# Altium PCB Bluetooth.PcbDoc
Units mm, origin at the board's own origin, x right, y up, seen from the top; angles counter-clockwise.
Board outline 43.18 x 24.38 mm, 2 copper layers (Top Layer, Bottom Layer); 14 components, 14 nets, 52 pads, 8 vias.
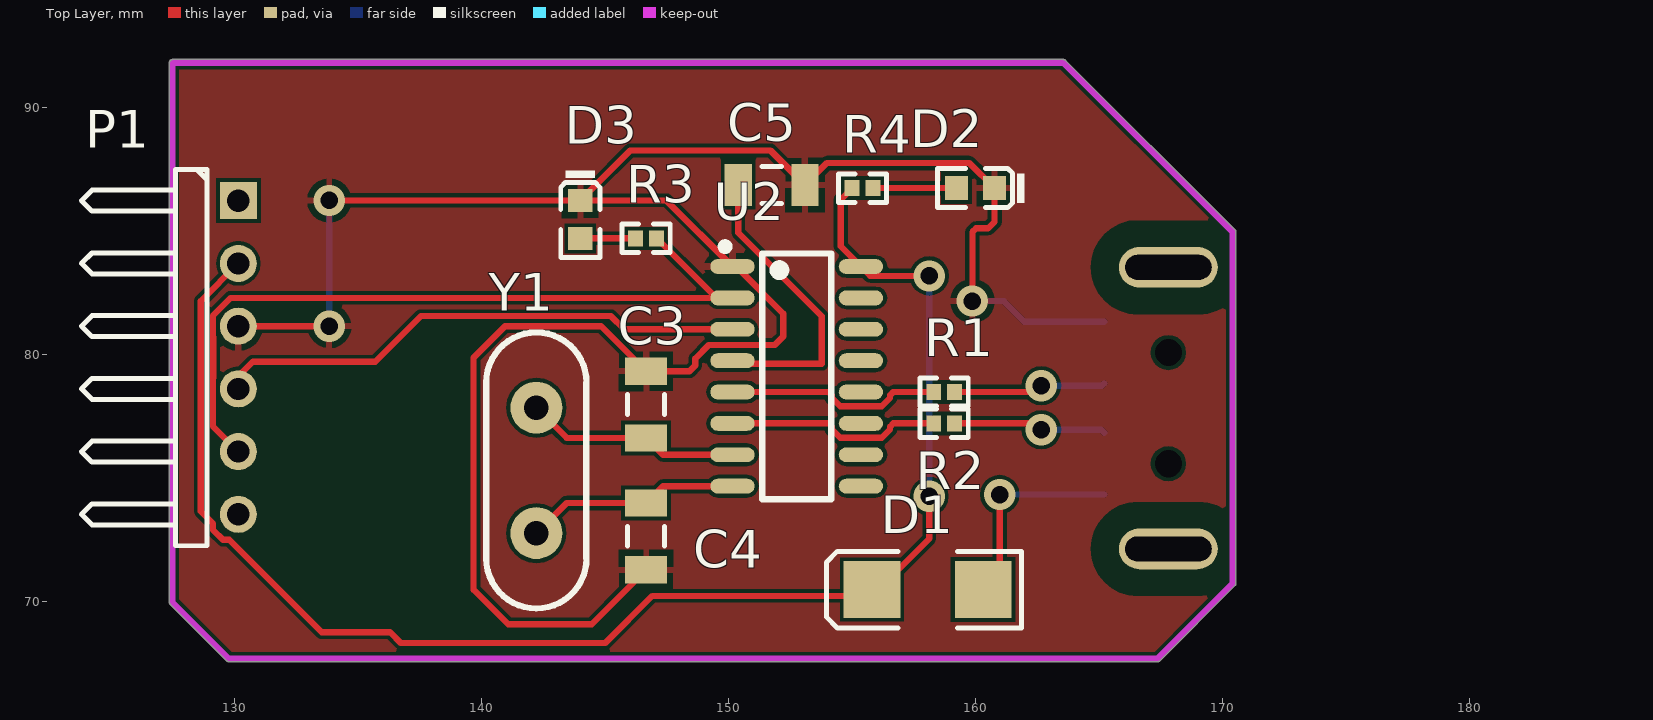
[diagram p0: Top Layer view]
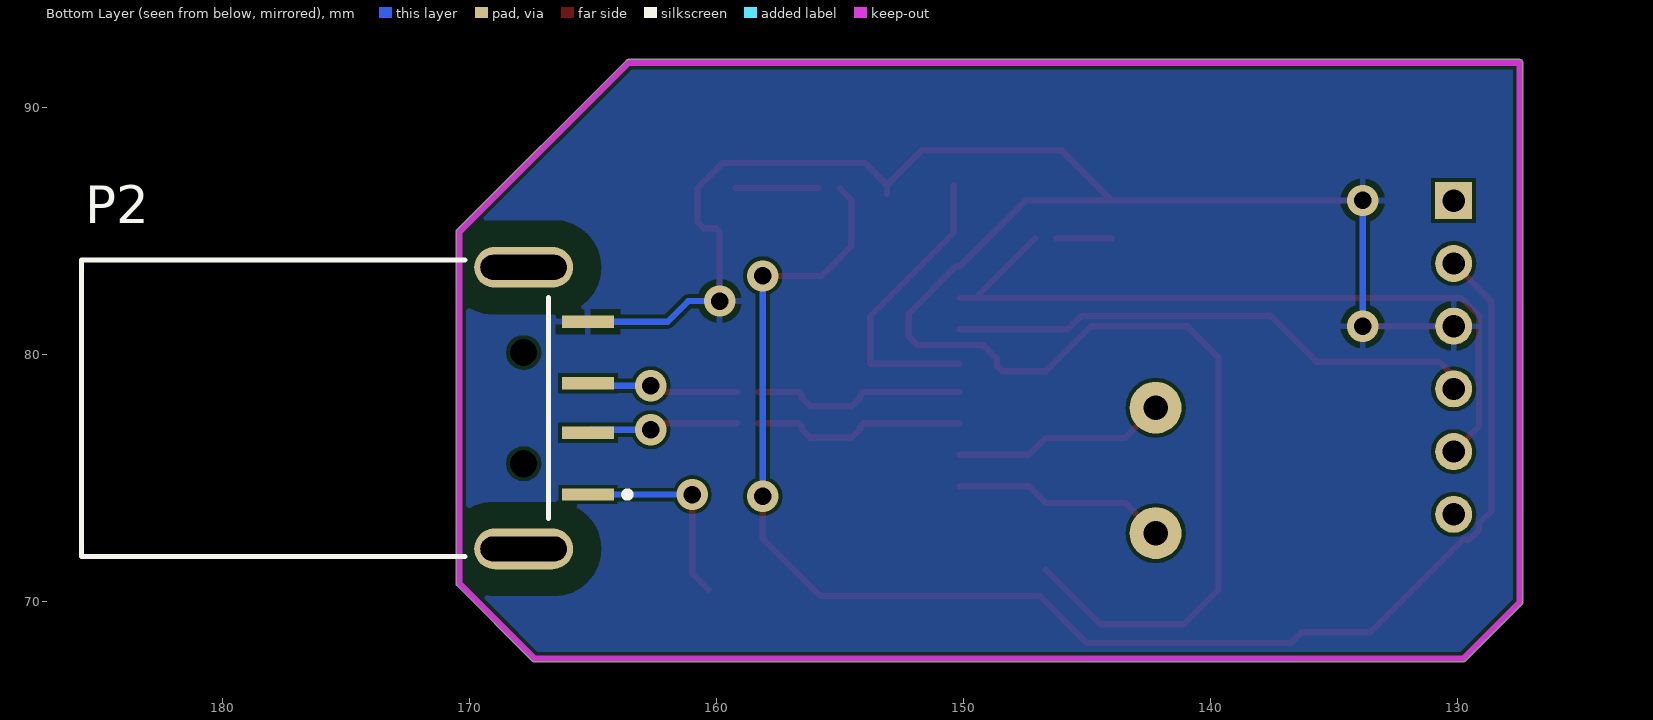
[diagram p1: Bottom Layer view, seen from below]

## Layer stack, top to bottom
Top Solder: solder mask 0.0102, Solder Resist, Dk 3.5
Top Layer: signal copper 0.0356
Dielectric 1: dielectric 0.32, FR-4, Dk 4.8
Bottom Layer: signal copper 0.0356
Bottom Solder: solder mask 0.0102, Solder Resist, Dk 3.5

## Board outline
127.418,69.887 129.704,67.601 129.703,67.601 ccw(c129.794,67.691) 129.794,67.564 167.386,67.564 ccw(c167.386,67.691) 167.477,67.601 167.476,67.601 170.524,70.649 170.524,70.648 ccw(c170.434,70.739) 170.561,70.739 170.561,84.963 ccw(c170.434,84.963) 170.524,85.054 170.524,85.053 163.666,91.911 163.667,91.911 ccw(c163.576,91.821) 163.576,91.948 127.508,91.948 ccw(c127.508,91.821) 127.381,91.821 127.381,69.977 ccw(c127.508,69.977)

## Design rules (kind name [scope] priority, off if disabled: settings)
Clearance [All] p1: gap=0.152 ignorepadtopadclearanceinfootprint=FALSE
PolygonConnect [All] p1: connectstyle=Relief reliefconductorwidth=0.254 reliefentries=4 polygonreliefangle="90 Angle" airgapwidth=0.254
RoutingVias [All] p1: holewidth=0.711 width=1.27 viastyle="Through Hole" minholewidth=0.711 minwidth=1.27 maxholewidth=0.711 maxwidth=1.27
SolderMaskExpansion [All] p1: expansion=0.102
Width [All] p1: maxlimit=0.254 minlimit=0.254 preferedwidth=0.254
30 further rules are at their usual default settings.

## Classes and differential pairs
component class bt: C3 C4 C5 D1 D2 D3 P1 P2 R3 R4 Y1

## Components (designator, comment, footprint, x,y, rotation, side; value= is the part's Value field where it differs from the comment)
C3 "Cap Semi" C1206 146.685,77.978 r90 top value=20pF
C4 "Cap Semi" C1206 146.685,72.644 r270 top value=20pF
C5 "Cap Semi" C1206 151.765,86.868 r0 top value=100nF
D1 "SS34" SMB 158.079,70.485 r180 top
D2 "绿灯 0603" 0603_LED_S1 160.02,86.741 r180 top
D3 "蓝灯 0603" 0603_LED_S1 144.018,85.471 r270 top
P1 "Header 6H" HDR1X6H 130.175,86.233 r270 top
P2 "1470695-1" 1470695 170.527,77.835 r0 bottom
R1 "22Ω" 0402_R 158.75,78.486 r180 top
R2 "22Ω" 0402_R 158.75,77.216 r180 top
R3 "10KΩ (1002) ±1%" 0402_R 146.685,84.709 r180 top
R4 "10KΩ (1002) ±1%" 0402_R 155.448,86.741 r0 top
U2 "CH340G" SOIC-16_150mil 152.781,79.121 r270 top
Y1 "12M" XTAL5 142.24,72.771 r90 top

## Footprints (in the part's own frame and the unit in brackets; to place one, negate y for a bottom-side part, rotate by r counter-clockwise, add the part's x,y. Pads: shape width x height; smd on the part's side, far side on the other; paste and mask are expansions set on the pad)
0402_R [mm]
  rect 0.6x0.65 smd mask+0.051: 1(-0.425,0) 2(0.425,0)
  silkscreen extent -0.97,-0.58 0.97,0.58, body extent -0.57,-0.27 0.58,0.28, height 0.41
0603_LED_S1 [mm]
  rect 0.93x0.98 smd: A(0.77,0) K(-0.77,0)
  silkscreen extent -1.98,-0.79 1.54,0.79, body extent -0.8,-0.4 0.8,0.4, height 0.6
1470695 [mm] "Connector; USB1.1, Type A, SM; 4 Position; Right Angle"
  rect 2.1x0.5 smd: 1(-5.3,3.5) 2(-5.3,1) 3(-5.3,-1) 4(-5.3,-3.5)
  oval 4x1.65 hole 3.5 slot 1 at 90 deg: 5(-2.7,-5.7) 6(-2.7,5.7)
  round 0.8 hole 1.1 unplated: MH1(-2.7,-2.25) MH2(-2.7,2.25)
  silkscreen extent -7.02,-6 15.2,6
C1206 [mm] "Chip Capacitor, Body 3.2x1.6mm, IPC High Density"
  rect 1.1x1.7 smd: 1(-1.35,0) 2(1.35,0)
  silkscreen extent -0.4,-0.75 0.4,0.75, body extent -1.7,-0.9 1.7,0.9, height 1.3
HDR1X6H [mm] "Connector; Header; 6 Position; Right Angle"
  rect 1.5x1.5 hole 0.9: 1(0,0)
  round 1.5 hole 0.9: 2(2.54,0) 3(5.08,0) 4(7.62,0) 5(10.16,0) 6(12.7,0)
  silkscreen extent -1.27,-6.35 13.97,-1.27
SMB [mm] "DO-214-AA/SMB; 2 C-Bend Leads; Body 5.3 x 3.6 mm, inc. leads (LxW)"
  rect 2.3x2.3 smd: 1(-2.25,0) 2(2.25,0)
  silkscreen extent -3.8,-1.55 4.1,1.55
SOIC-16_150mil [mm]
  oval 0.6x1.8 smd: 1(-4.445,-2.6) 2(-3.175,-2.6) 3(-1.905,-2.6) 4(-0.635,-2.6) 5(0.635,-2.6) 6(1.905,-2.6) 7(3.175,-2.6) 8(4.445,-2.6) 9(4.445,2.6) 10(3.175,2.6) 11(1.905,2.6) 12(0.635,2.6) 13(-0.635,2.6) 14(-1.905,2.6) 15(-3.175,2.6) 16(-4.445,2.6)
  silkscreen extent -5.4,-3.05 4.97,1.4
XTAL5 [mm]
  round 2.1 hole 1: 1(0,0) 2(5.08,0)
  silkscreen extent -3.05,-2.03 8.13,2.03

## Part data
C3 C4 C5: "Capacitor (Semiconductor SIM Model)", LatestRevisionDate=29-May-2009, LatestRevisionNote="IPC-7351 Footprint Added.", PackageDescription="Chip Capacitor", PackageReference=C1206, Published=8-Jun-2000, Publisher="Altium Limited"
D1: library part "D Schottky", "Schottky Diode", Code_JEDEC=DO-214-AA, LatestRevisionDate=17-Jul-2002, LatestRevisionNote="Re-released for DXP Platform.", PackageDescription="DO-214-AA/SMB; 2 C-Bend Leads; Body 5.3 x 3.6 mm, inc. leads (LxW)", PackageReference=SMB, Published=8-Jun-2000, Publisher="Altium Limited"
D2: library part "0603 绿灯", "发光二极管", Package=0603, SuppliersPartNumber=C72043, ComponentLink1Description=供应商, ComponentLink1URL=http://www.szlcsc.com/product/details_73152.html, Supplier=LC
D3: library part "0603 蓝灯", "发光二极管", Package=0603, SuppliersPartNumber=C72041, ComponentLink1Description=供应商, ComponentLink1URL=http://www.szlcsc.com/product/details_73150.html, Supplier=LC
P1: "Header, 6-Pin, Right Angle", LatestRevisionDate=17-Jul-2002, LatestRevisionNote="Re-released for DXP Platform.", Publisher="Altium Limited"
P2: "USB 1.1, Right Angle, SMT, A Type, Plug, 4 Position, Natural", PackageDocument=21-Jan-2003, ComponentLink1Description="Manufacturer Link", ComponentLink1URL=http://www.tycoelectronics.com/, ComponentLink2Description="Packaging Specification", ComponentLink2URL=http://ecommas.tycoelectronics.com/commerce/DocumentDelivery/DDEController?Action=showdoc&DocId=Customer+Drawing%7F1470695%7FO%7Fpdf%7FEnglish%7FC_1470695_O.pdf, ContactMaterial=Brass, ContactPlating="Gold (30) over Nickel (50)", DatasheetDocument=21-Jan-2003, DrillSize="Corresponds to nominal value.", HousingMaterial=Thermoplastic, PackageReference=1470695, PanelGround=Without, PCB_Layout="Complies with manufacturer's recommendation.", Published=15-Jul-2004, Publisher="Altium Limited"
R1 R2: library part "0402 22Ω (22R0) 1%", "贴片电阻", Package=0402, SuppliersPartNumber=C25092, ComponentLink1Description=供应商, ComponentLink1URL=http://www.szlcsc.com/product/details_25835.html, Supplier=LC
R3 R4: library part "0402 10KΩ (1002) 1%", "贴片电阻", Package=0402, SuppliersPartNumber=C25744, ComponentLink1Description=供应商, ComponentLink1URL=http://www.szlcsc.com/product/details_26487.html, Supplier=LC
U2: library part CH340G_[C14267], "USB", Package=SOIC-16_150mil, SuppliersPartNumber=C14267, ComponentLink1Description=供应商, ComponentLink1URL=http://www.szlcsc.com/product/details_14927.html, Supplier=LC
Y1: library part XTAL, "Crystal Oscillator", LatestRevisionDate=17-Jul-2002, LatestRevisionNote="Re-released for DXP Platform.", PackageReference=R38, Published=8-Jun-2000, Publisher="Altium Limited"

## Via types
v1: diameter 1.27, hole 0.711, Top Layer to Bottom Layer, 8 vias

## Nets (pads, with @x,y where several pads share a name; then routed paths per layer and width w, separated by ;. In a path a pad name is that pad's centre, name@x,y a point inside that pad or via, vN(x,y) a via of type N, cw(c..) or ccw(c..) an arc to the next point about the centre after c; other vN are vias at no path point)
5V: D1.2 P1.2 R4.1 U2.16 | length 61.6
  Top Layer w0.254: P1.2 128.651,82.169 128.651,73.66 129.146,73.165 129.146,72.911 129.553,72.504 129.807,72.504 133.553,68.758 136.319,68.758 136.751,68.326 145.034,68.326 146.939,70.231 155.829,70.231 158.151,72.553 v1(158.151,74.259) ; R4.1 154.559,86.277 154.559,84.388 U2.16 155.762,83.185 v1(158.151,83.185)
  Bottom Layer w0.254: v1(158.151,74.259) v1(158.151,83.185) v1@158.151,83.276
GND: C3.2 C4.2 C5.2 D2.K D3.K P1.3 P2.4 U2.1 | length 92.7
  Top Layer w0.254: P1.3 v1(133.858,81.153) ; v1(133.858,86.241) D3.K ; C4.2 144.479,69.088 141.097,69.088 139.7,70.485 139.7,79.883 140.97,81.153 144.86,81.153 C3.2 148.441,79.328 148.674,79.561 148.674,79.84 149.225,80.391 151.892,80.391 152.235,80.734 152.235,81.661 150.33,83.566 U2.1 147.506,86.241 D3.K ; C5.2@153.115,86.5 C5.2 ; v1(159.893,82.169) 159.893,84.963 160.042,85.112 160.528,85.112 160.79,85.374 D2.K 159.774,87.757 154.004,87.757 C5.2 ; D3.K 146.042,88.265 151.718,88.265 C5.2
  Bottom Layer w0.254: v1(133.858,81.153) v1(133.858,86.241) ; v1(159.893,82.169) 161.163,82.169 161.997,81.335 P2.4
NetC3_1: C3.1 U2.7 Y1.2 | length 8.7
  Top Layer w0.254: Y1.2 143.463,76.628 C3.1 147.367,75.946 U2.7
NetC4_1: C4.1 U2.8 Y1.1 | length 8.7
  Top Layer w0.254: Y1.1 143.463,73.994 C4.1 147.367,74.676 U2.8
NetC5_1: C5.1 U2.4 | length 12.3
  Top Layer w0.254: U2.4@150.181,79.629 153.797,79.629 153.797,81.556 150.415,84.938 C5.1
NetD2_A: D2.A R4.2 | length 3.4
  Top Layer w0.254: R4.2 D2.A
NetD3_A: D3.A R3.2 | length 2.2
  Top Layer w0.254: D3.A 144.026,84.709 R3.2
NetP2_2: P2.2 R2.1 | length 6.2
  Top Layer w0.254: R2.1 162.433,77.216 v1(162.687,76.962)
  Bottom Layer w0.254: v1(162.687,76.962) 165.1,76.962 P2.2
NetP2_3: P2.3 R1.1 | length 6.2
  Top Layer w0.254: R1.1 162.433,78.486 v1(162.687,78.74)
  Bottom Layer w0.254: v1(162.687,78.74) 165.132,78.74 P2.3
NetR1_2: R1.2 U2.5 | length 8.8
  Top Layer w0.254: U2.5 154.069,78.486 154.202,78.354 154.202,78.246 154.541,77.907 156.221,77.907 156.56,78.246 156.56,78.354 156.693,78.486 R1.2
NetR2_2: R2.2 U2.6 | length 8.8
  Top Layer w0.254: U2.6 154.069,77.216 154.202,77.084 154.202,76.976 154.541,76.637 156.221,76.637 156.56,76.976 156.56,77.084 156.693,77.216 R2.2
RXD: P1.4 U2.3 | length 21.7
  Top Layer w0.254: P1.4 130.175,79.121 130.766,79.712 135.719,79.712 137.566,81.559 145.263,81.559 145.796,81.026 U2.3
TXD: P1.5 R3.1 U2.2 | length 30.7
  Top Layer w0.254: P1.5 129.146,77.102 129.146,79.039 129.159,79.053 129.159,80.713 129.146,80.727 129.146,81.579 129.862,82.296 U2.2@149.523,82.296 ; R3.1 U2.2@149.523,82.296 ; U2.2 U2.2@149.523,82.296
VBUS: D1.1 P2.1 | length 8.4
  Top Layer w0.254: D1.1 160.996,71.152 v1(160.996,74.335)
  Bottom Layer w0.254: v1(160.996,74.335) P2.1
pads on no net: P1.1 P1.6 P2.5 P2.6 P2.MH1 P2.MH2 U2.9 U2.10 U2.11 U2.12 U2.13 U2.14 U2.15

## Polygon pours and split planes (outlines as drawn)
GND on Top Layer "GND_L01_P008" (solid, remove dead copper, pour order 8): 127.418,69.887 129.704,67.601 129.703,67.601 ccw(c129.794,67.691) 129.794,67.564 167.386,67.564 ccw(c167.386,67.691) 167.477,67.601 167.476,67.601 170.524,70.649 170.524,70.648 ccw(c170.434,70.739) 170.561,70.739 170.561,84.963 ccw(c170.434,84.963) 170.524,85.054 170.524,85.053 163.666,91.911 163.667,91.911 ccw(c163.576,91.821) 163.576,91.948 127.508,91.948 ccw(c127.508,91.821) 127.381,91.821 127.381,69.977 ccw(c127.507,69.977)
GND on Bottom Layer "GND_L02_P009" (solid, remove dead copper, pour order 9): 127.418,69.887 129.704,67.601 129.703,67.601 ccw(c129.794,67.691) 129.794,67.564 167.386,67.564 ccw(c167.386,67.691) 167.477,67.601 167.476,67.601 170.524,70.649 170.524,70.648 ccw(c170.434,70.739) 170.561,70.739 170.561,84.963 ccw(c170.434,84.963) 170.524,85.054 170.524,85.053 163.666,91.911 163.667,91.911 ccw(c163.576,91.821) 163.576,91.948 127.508,91.948 ccw(c127.508,91.821) 127.381,91.821 127.381,69.977 ccw(c127.507,69.977)

## Keep-outs
Keep-Out Layer:
  lines w0.254: 163.068,91.821 163.576,91.821 170.434,84.963 170.434,84.582 170.434,73.914 170.434,70.739 168.942,69.247 167.386,67.691 165.608,67.691 164.211,67.691 129.794,67.691 127.508,69.977 127.508,91.821 163.195,91.821

## Text inside footprints (layer, text, board x,y; h text height)
P2: Mechanical 1 "PCB Edge" at 171,83.008 h0.25 r90; Mechanical 1 "Alert PCB fab to slot details" at 169.527,69.659 h0.3 r180; Mechanical 1 "Slot 1x2.5mm, PTH" at 169.527,70.159 h0.3 r180; Mechanical 1 "Assign keep-out area to slot" at 169.527,69.159 h0.3 r180; Mechanical 1 "Mech 1 - Slot cut-out" at 169.527,70.659 h0.3 r180; Mechanical 1 "Mech 2 - Clearance, move to internal plane if present" at 169.527,71.159 h0.3 r180